# EAGLE board Ham-Dip-002-1 (EAGLE 8.2.1)
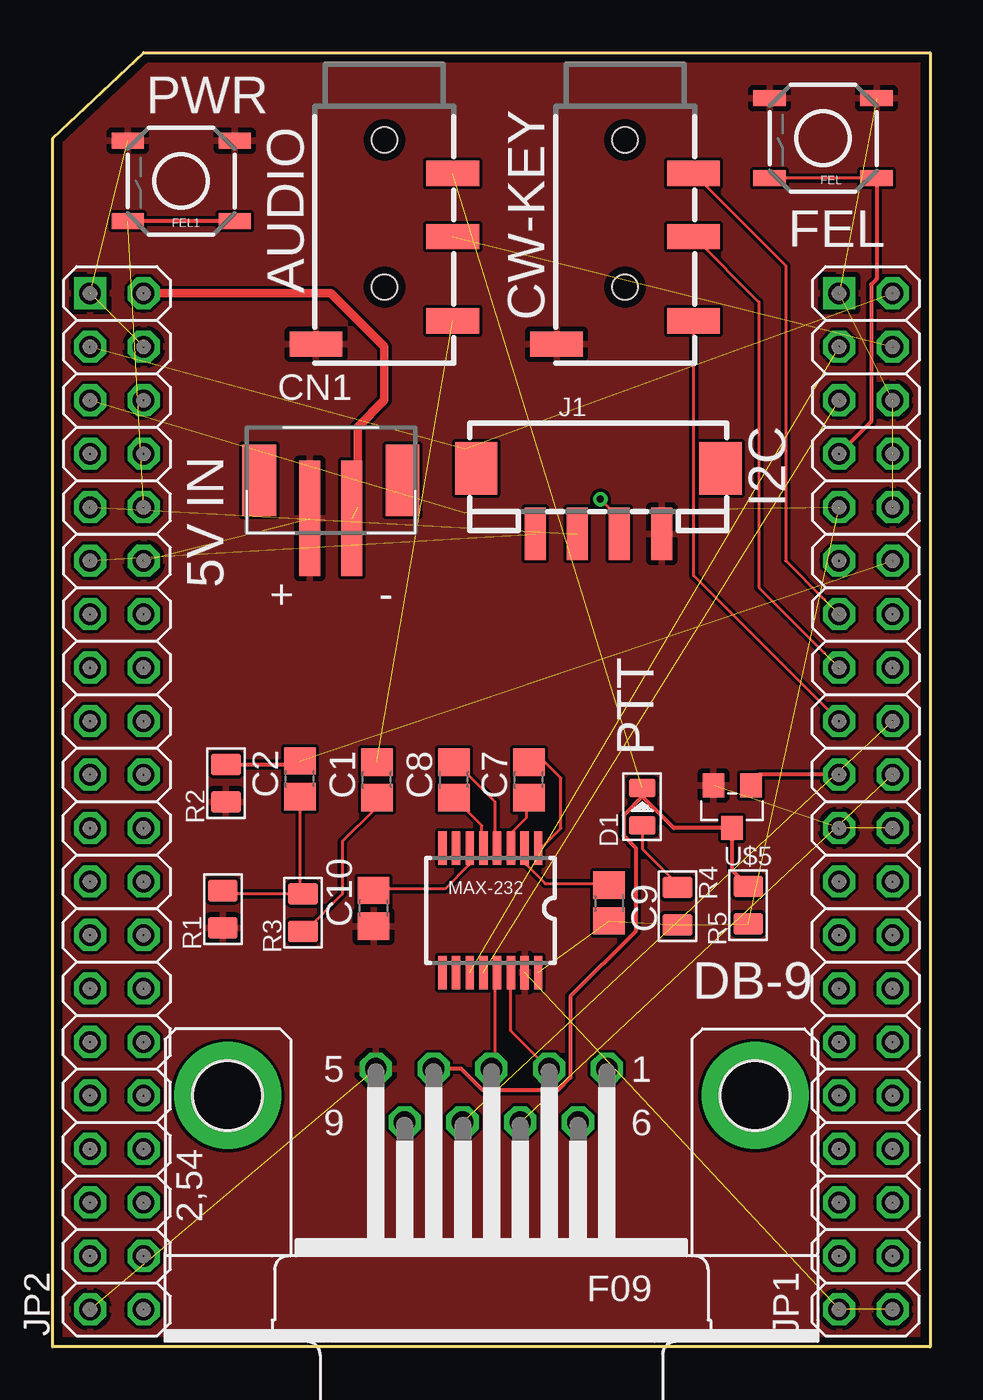
[diagram p0: board, top side]
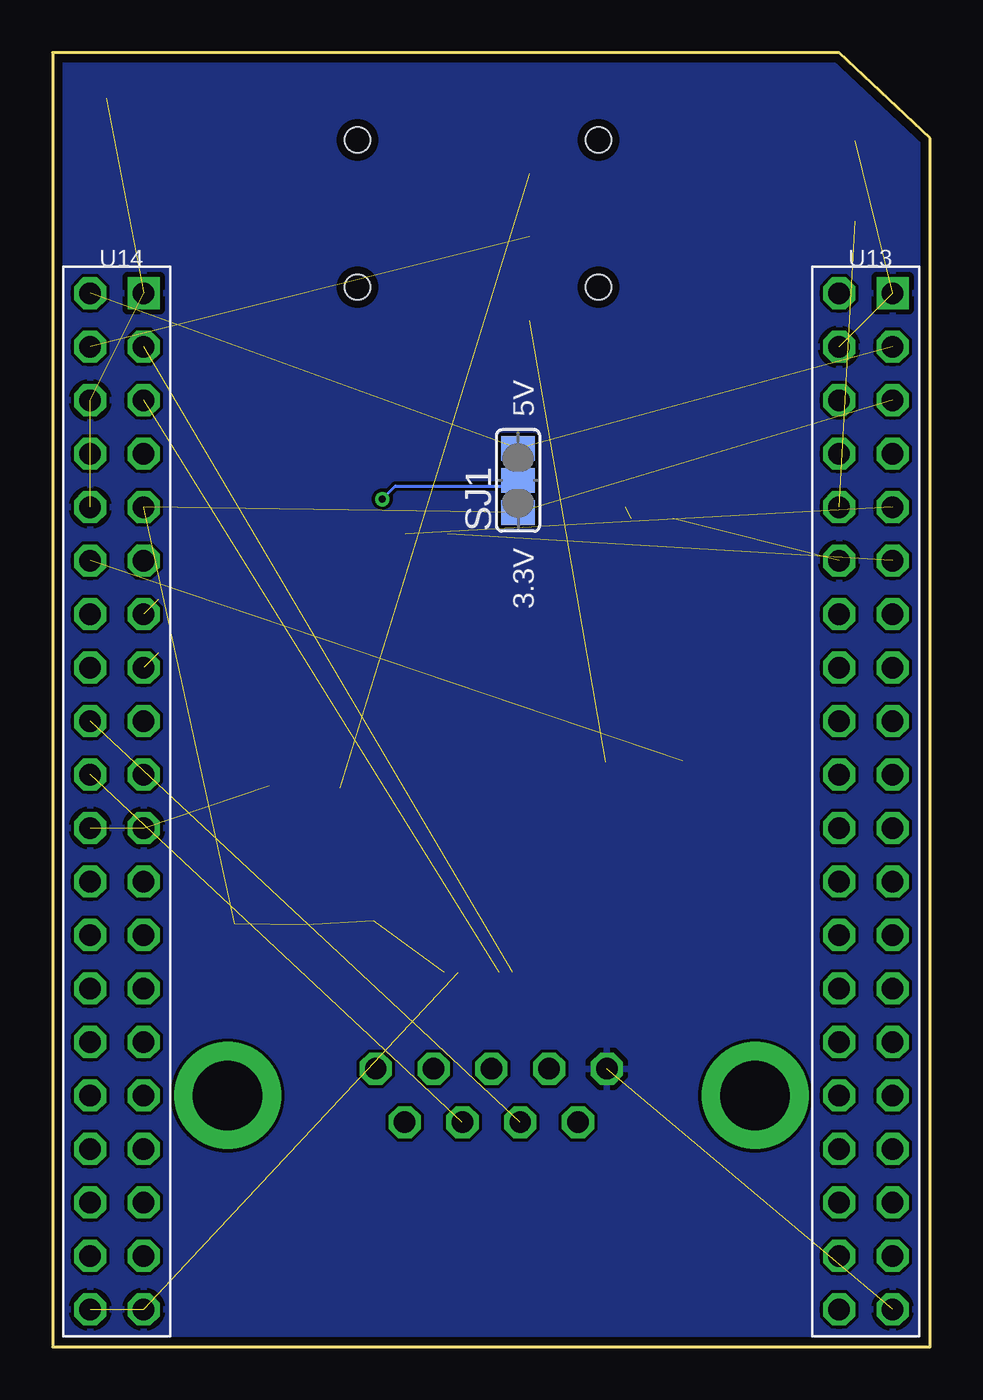
[diagram p1: board, bottom side, seen from below]

Size 41.66 x 61.47 mm. Coordinates in mm from the lower left corner, seen from the top.
Outline: 0,0 0,57.4 4.32,61.47 41.66,61.47 41.66,0 0,0
Copper layers (1*16): Top 0.0356mm / dielectric 1.5011mm / Bottom 0.0356mm
Design rules "LaenPCBOrder": minimum track width 6mil, minimum drill 13mil, track to track 6mil, track to pad 6mil, pad to pad 6mil, via to via 6mil, smd to smd 6mil, copper to edge 15mil, drill to drill 6mil, minimum pad ring 7mil, minimum via ring 7mil, stop-mask expansion 4mil, vias tented up to drill 0mil, thermal gap 10mil

## Footprints (pad centres in the part's own frame; a part is rotated, then mirrored left to right if it is on the bottom)
AUDIO-JACK-TRRS-SMD = smd 1.2 x 2.5: EARTH 11.3,-3.25; RING1 6.2,3.25; RING2 3.2,3.25; TIP 10.2,3.25 | hole 1.2: 1.6,0; 8.6,0
C0805 = smd 1.3 x 1.5: 1 -0.85,0; 2 0.85,0
JST-PH-2-SMT = smd 1 x 5.5: 1 -1,-1.8; 2 1,-1.8 | smd 1.6 x 3.4: NC1 -3.4,0; NC2 3.4,0
LED-0805 = smd 0.889 x 1.27: + -0.889,0; - 0.889,0
F09HP = drill 1.016 octagon: 1 -5.486,-1.27; 2 -2.743,-1.27; 3 0,-1.27; 4 2.743,-1.27; 5 5.486,-1.27; 6 -4.115,1.27; 7 -1.372,1.27; 8 1.372,1.27; 9 4.115,1.27 | drill 3.302 pad 5.08: G1 -12.522,0; G2 12.522,0
TACTILE_SWITCH_SMD = smd 1.524 x 0.762: 1 -2.54,1.905; 2 2.54,1.905; 3 -2.54,-1.905; 4 2.54,-1.905
HW4-SMD-2.0 = smd 1 x 2.5: 1 -3,0; 2 -1,0; 3 1,0; 4 3,0 | smd 2 x 2.5: SS1 -5.8,3.123; SS2 5.8,3.123
2X20 = drill 1.016 octagon: 1 -24.13,-1.27; 2 -24.13,1.27; 3 -21.59,-1.27; 4 -21.59,1.27; 5 -19.05,-1.27; 6 -19.05,1.27; 7 -16.51,-1.27; 8 -16.51,1.27; 9 -13.97,-1.27; 10 -13.97,1.27; 11 -11.43,-1.27; 12 -11.43,1.27; 13 -8.89,-1.27; 14 -8.89,1.27; 15 -6.35,-1.27; 16 -6.35,1.27; 17 -3.81,-1.27; 18 -3.81,1.27; 19 -1.27,-1.27; 20 -1.27,1.27; 21 1.27,-1.27; 22 1.27,1.27; 23 3.81,-1.27; 24 3.81,1.27; 25 6.35,-1.27; 26 6.35,1.27; 27 8.89,-1.27; 28 8.89,1.27; 29 11.43,-1.27; 30 11.43,1.27; 31 13.97,-1.27; 32 13.97,1.27; 33 16.51,-1.27; 34 16.51,1.27; 35 19.05,-1.27; 36 19.05,1.27; 37 21.59,-1.27; 38 21.59,1.27; 39 24.13,-1.27; 40 24.13,1.27
TSSOP16 = smd 0.4 x 1.6: 1 -2.225,-2.85; 2 -1.575,-2.85; 3 -0.925,-2.85; 4 -0.275,-2.85; 5 0.375,-2.85; 6 1.025,-2.85; 7 1.675,-2.85; 8 2.325,-2.85; 9 2.325,3.05; 10 1.675,3.05; 11 1.025,3.05; 12 0.375,3.05; 13 -0.275,3.05; 14 -0.925,3.05; 15 -1.575,3.05; 16 -2.225,3.05
R0805 = smd 1.397 x 1.016: 1 0,0.889; 2 0,-0.889
SMD_SJ_3WAY_OPEN = smd 1.168 x 1.6: 1 -1.524,0; 2 0,0; 3 1.524,0
2X20CHIP-TH = drill 1.016: AP-EINT1 36.83,21.59; AP-EINT3 39.37,21.59; BAT 3.81,41.91; CHG-IN 3.81,49.53; CSICK 39.37,16.51; CSID0 36.83,11.43; CSID1 39.37,11.43; CSID2 36.83,8.89; CSID3 39.37,8.89; CSID4 36.83,6.35; CSID5 39.37,6.35; CSID6 36.83,3.81; CSID7 39.37,3.81; CSIHSYNC 36.83,13.97; CSIPCK 36.83,16.51; CSIVSYNC 39.37,13.97; FEL 36.83,41.91; GND@1 3.81,36.83; GND@2 1.27,1.27; GND@4 39.37,24.13; GND@5 39.37,1.27; GND@6 36.83,1.27; GND@7 36.83,24.13; GND@10 3.81,46.99; HPCOM 39.37,44.45; HPL 39.37,46.99; HPR 39.37,41.91; LCD-CLK 1.27,6.35; LCD-D2 1.27,29.21; LCD-D3 3.81,26.67; LCD-D4 1.27,26.67; LCD-D5 3.81,24.13; LCD-D6 1.27,24.13; LCD-D7 3.81,21.59; LCD-D10 1.27,21.59; LCD-D11 3.81,19.05; LCD-D12 1.27,19.05; LCD-D13 3.81,16.51; LCD-D14 1.27,16.51; LCD-D15 3.81,13.97; LCD-D18 1.27,13.97; LCD-D19 3.81,11.43; LCD-D20 1.27,11.43; LCD-D21 3.81,8.89; LCD-D22 1.27,8.89; LCD-D23 3.81,6.35; LCD-DE 3.81,1.27; LCD-HSYNC 3.81,3.81; LCD-VSYNC 1.27,3.81; LRADC 36.83,36.83; MICIN1 39.37,36.83; MICM 39.37,39.37; PWM0 3.81,29.21; PWRON 3.81,39.37; TS 3.81,44.45; TWI1-SCK 1.27,36.83; TWI1-SDA 1.27,39.37; TWI2-SCK 39.37,19.05; TWI2-SDA 36.83,19.05; UART1-RX 36.83,44.45; UART1-TX 36.83,46.99; VCC1V8 1.27,41.91; VCC3V3 1.27,44.45; VCC3V3@1 36.83,39.37; VCC5V@0 1.27,46.99; VCC5V@1 39.37,49.53; X1 1.27,34.29; X2 3.81,34.29; XIO-P0 36.83,34.29; XIO-P1 39.37,34.29; XIO-P2 36.83,31.75; XIO-P3 39.37,31.75; XIO-P4 36.83,29.21; XIO-P5 39.37,29.21; XIO-P6 36.83,26.67; XIO-P7 39.37,26.67; Y1 1.27,31.75; Y2 3.81,31.75 | drill 1.016 square: GND@3 1.27,49.53; GND@8 36.83,49.53
SOT-23 = smd 1.016 x 1.143: 1 -0.889,-1.016; 2 0.889,-1.016; 3 0,1.016

## Placement (x,y rotation side)
AUDIO-JACK  TRRS  [AUDIO-JACK-TRRS-SMD]  15.75,58.93 270 top
C1  1uF  [C0805]  15.39,26.92 90 top
C2  1uF  [C0805]  11.73,26.97 90 top
C7  1uF  [C0805]  22.61,26.92 90 top
C8  1uF  [C0805]  19.05,26.92 90 top
C9  1uF  [C0805]  26.42,21.08 270 top
C10  1uF  [C0805]  15.24,20.83 90 top
CN1  [JST-PH-2-SMT]  13.21,41.15 0 top
CW-JACK  TRRS  [AUDIO-JACK-TRRS-SMD]  27.18,58.93 270 top
D1  RED-0805  [LED-0805]  27.99,25.65 90 top
DB-9  [F09HP]  20.83,11.94 180 top
FEL  reset  [TACTILE_SWITCH_SMD]  36.58,57.4 180 top
FEL1  reset  [TACTILE_SWITCH_SMD]  6.1,55.37 180 top
J1  H4P-SMD-2.0  [HW4-SMD-2.0]  25.91,38.61 0 top
JP1  [2X20]  38.61,25.91 90 top
JP2  [2X20]  3.05,25.91 90 top
MAX-232  MAX232TSSOP  [TSSOP16]  20.83,20.83 180 top
R1  2.2K  [R0805]  8.08,20.78 180 top
R2  2.2K  [R0805]  8.23,26.77 180 top
R3  10K  [R0805]  11.89,20.62 180 top
R4  330R  [R0805]  29.67,20.93 0 top
R5  10K  [R0805]  33.02,20.98 180 top
SJ1  [SMD_SJ_3WAY_OPEN]  19.56,41.15 90 bottom
U$2  2X20-CHIP2X20-PTH  [2X20CHIP-TH]  0.51,0.51 0 top
U$5  MMBT3904LT1G  [SOT-23]  32.26,25.65 180 top

## Library data of the parts
AUDIO-JACK CW-JACK = SparkFun-Connectors
C1 C2 C7-C10 CN1 JP1 JP2 = adafruit
D1 = Seeed-LED-2016; MPN: 17-215SURC/S530-A2/TR8
DB-9 = con-subd; OC_FARNELL: unknown; OC_NEWARK: unknown
FEL FEL1 = SparkFun-Electromechanical; PROD_ID: SWCH-08247
J1 = Seeed-Connector -2016
MAX-232 = SparkFun-DigitalIC
R1 R2 = Seeed-Resistor-2016; MPN: RC0805JR-072K2L
R3 R5 = Seeed-Resistor-2016; MPN: RC0805FR-0710KL
R4 = Seeed-Resistor-2016; MPN: RC0805JR-07220RL
SJ1 = JKW_CHIP
U$2 = JKW_CHIP; DESCRIPTION: 2x20 .100" headers; FOOTPRINT: 2x20 .100" CHIP foot print; VENDOR: ASSMANN; VENDOR_PART_NUMBER: AWHW40-G-SMD-R (single)
U$5 = Seeed-Transistor-2016; MPN: MMBT3904LT1G

## Nets
5V-IN: CN1.2 U$2.CHG-IN
ADC: U$2.LRADC
AIN: DB-9.9
AUDIO-IN: AUDIO-JACK.TIP C1.2
AUDIO-OUT: AUDIO-JACK.RING1 U$2.HPL
CW-KEY-1: CW-JACK.TIP U$2.XIO-P4
CW-KEY-2: CW-JACK.RING1 U$2.XIO-P2
CW-KEY-3: CW-JACK.RING2 U$2.XIO-P0
FEL: FEL.1 FEL.2 U$2.FEL
GND: AUDIO-JACK.EARTH C10.1 CN1.1 CW-JACK.EARTH DB-9.5 FEL1.3 FEL1.4 FEL.3 FEL.4 J1.4 MAX-232.15 R1.1 R2.1 U$2.GND@1 U$2.GND@2 U$2.GND@3 U$2.GND@4 U$2.GND@5 U$2.GND@6 U$2.GND@7 U$2.GND@8 U$2.GND@10 U$2.HPCOM U$2.MICM U$5.2
GPIO-1: DB-9.8 U$2.XIO-P5
GPIO-2: DB-9.7 U$2.XIO-P7
MIC-IN: C2.2 R2.2 U$2.MICIN1
N$1: D1.+ R4.1
N$3: C1.1 R3.1
N$4: C2.1 R1.2 R3.2
N$5: J1.3 SJ1.2
N$6: C9.1 MAX-232.2
N$11: C10.2 MAX-232.6
N$16: C7.2 MAX-232.1
N$17: C8.2 MAX-232.4
N$18: C7.1 MAX-232.3
N$19: C8.1 MAX-232.5
PTT: AUDIO-JACK.RING2 D1.- DB-9.4 R5.2 U$5.3
PWR-UP: FEL1.1 FEL1.2 U$2.PWRON
RX: MAX-232.12 U$2.UART1-RX
RXD: DB-9.3 MAX-232.13
TW1-SCK: J1.1 U$2.TWI1-SCK
TW1-SDA: J1.2 U$2.TWI1-SDA
TX: MAX-232.11 U$2.UART1-TX
TXD: DB-9.2 MAX-232.14
VCC: SJ1.3 U$2.VCC5V@0 U$2.VCC5V@1
VCC-1V8: U$2.VCC1V8
VCC/2: C9.2 MAX-232.16 R4.2 R5.1 SJ1.1 U$2.VCC3V3 U$2.VCC3V3@1
XMIT: U$2.XIO-P6 U$5.1

## Tracks (layer width: path | path; a pad name or v marks a point on that pad's centre or on a via)
5V-IN  (1 unrouted)
  Top 0.406: U$2.CHG-IN 13.21,50.04 15.75,47.5 15.75,44.96 14.48,43.69 14.48,39.88
AUDIO-IN  (1 unrouted)
AUDIO-OUT  (1 unrouted)
CW-KEY-1
  Top 0.152: U$2.XIO-P4 30.43,36.63 CW-JACK.TIP
CW-KEY-2  (1 unrouted)
  Top 0.152: CW-JACK.RING1 33.53,49.63 33.53,36.07 36.64,32.96
CW-KEY-3  (1 unrouted)
  Top 0.152: CW-JACK.RING2 34.8,51.36 34.8,37.34 36.64,35.5
FEL
  Top 0.152: FEL.2 34.13,55.51 39.01,55.51 FEL.1
  Top 0.2: FEL.1 39.12,50.71 38.86,50.46 38.86,43.94 U$2.FEL
GND  (11 unrouted)
  pour Bottom: -2.03,61.47 41.15,61.47 42.42,-0.76 -2.03,-0.76
  pour Top: -4.57,61.47 41.15,61.47 41.15,-2.03 -4.57,-2.03
GPIO-1  (1 unrouted)
GPIO-2  (1 unrouted)
MIC-IN  (1 unrouted)
  Top 0.2: R2.2 11.57,27.66 C2.2
N$1
  Top 0.152: D1.+ 28.01,24.76 28.01,23.63 29.76,21.88 R4.1
N$3
  Top 0.152: R3.1 12.01,19.76 13.76,21.51 13.76,24.01 15.26,25.51 15.26,26.01 C1.1
N$4
  Top 0.152: R1.2 8.26,21.51 11.76,21.51 R3.2 11.76,21.76 11.76,26.01 C2.1
N$5  (via drill 0.33)
  Top 0.152: v26.01,40.26 26.88,39.38 26.88,38.63 J1.3
  Bottom 0.152: v26.01,40.26 25.38,40.88 19.88,40.88 19.63,41.13 SJ1.2
N$6
  Top 0.152: C9.1 26.38,22.01 23.38,22.01 22.51,22.88 22.51,23.63 MAX-232.2
N$11
  Top 0.152: C10.2 15.26,21.76 18.63,21.76 19.76,22.88 19.76,23.63 MAX-232.6
N$16
  Top 0.152: C7.2 22.63,27.76 23.38,27.76 24.13,27.01 24.13,24.63 23.13,23.63 MAX-232.1
N$17
  Top 0.152: C8.2 19.13,27.76 21.01,25.88 21.01,23.76 MAX-232.4
N$18
  Top 0.152: C7.1 22.51,26.01 22.51,25.13 21.76,24.38 21.76,23.76 MAX-232.3
N$19
  Top 0.152: C8.1 19.13,26.01 20.38,24.76 20.38,23.76 MAX-232.5
PTT  (1 unrouted)
  Top 0.2: R5.2 32.26,22.63 U$5.3 29.49,24.64 27.99,26.14 | 27.99,26.14 D1.- | 27.99,26.14 27.1,25.25 27.1,24.28 27.68,23.7 27.68,19.74 24.59,16.64 24.59,12.79 23.99,12.19 20.41,12.19 19.39,13.21 DB-9.4
PWR-UP  (1 unrouted)
  Top 0.2: FEL1.1 FEL1.2
RX  (1 unrouted)
RXD
  Top 0.152: MAX-232.13 21.01,17.76 21.01,13.38 20.88,13.26 DB-9.3
TW1-SCK  (1 unrouted)
TW1-SDA  (1 unrouted)
TX  (1 unrouted)
TXD
  Top 0.152: MAX-232.14 21.76,17.76 21.76,15.01 23.51,13.26 DB-9.2
VCC  (2 unrouted)
VCC/2  (6 unrouted)
XMIT
  Top 0.2: U$2.XIO-P6 33.53,27.18 33.53,27.05 U$5.1

## Text on the board
tPlace: PWR | FEL | AUDIO | CW-KEY | I2C | 5V IN | PTT
bPlace: 5V | 3.3V